# Altium PCB 安抚版大号发球机 1.6mm 双面板.PcbDoc (part 2 of 3)
Units mil, origin at the board's own origin, x right, y up, seen from the top; angles counter-clockwise.
Board outline 2637.8 x 5118.11 mil, 2 copper layers (Top Layer, Bottom Layer); 155 components, 97 nets, 435 pads, 221 vias.
Unrouted connection lines stored in the file: 1.
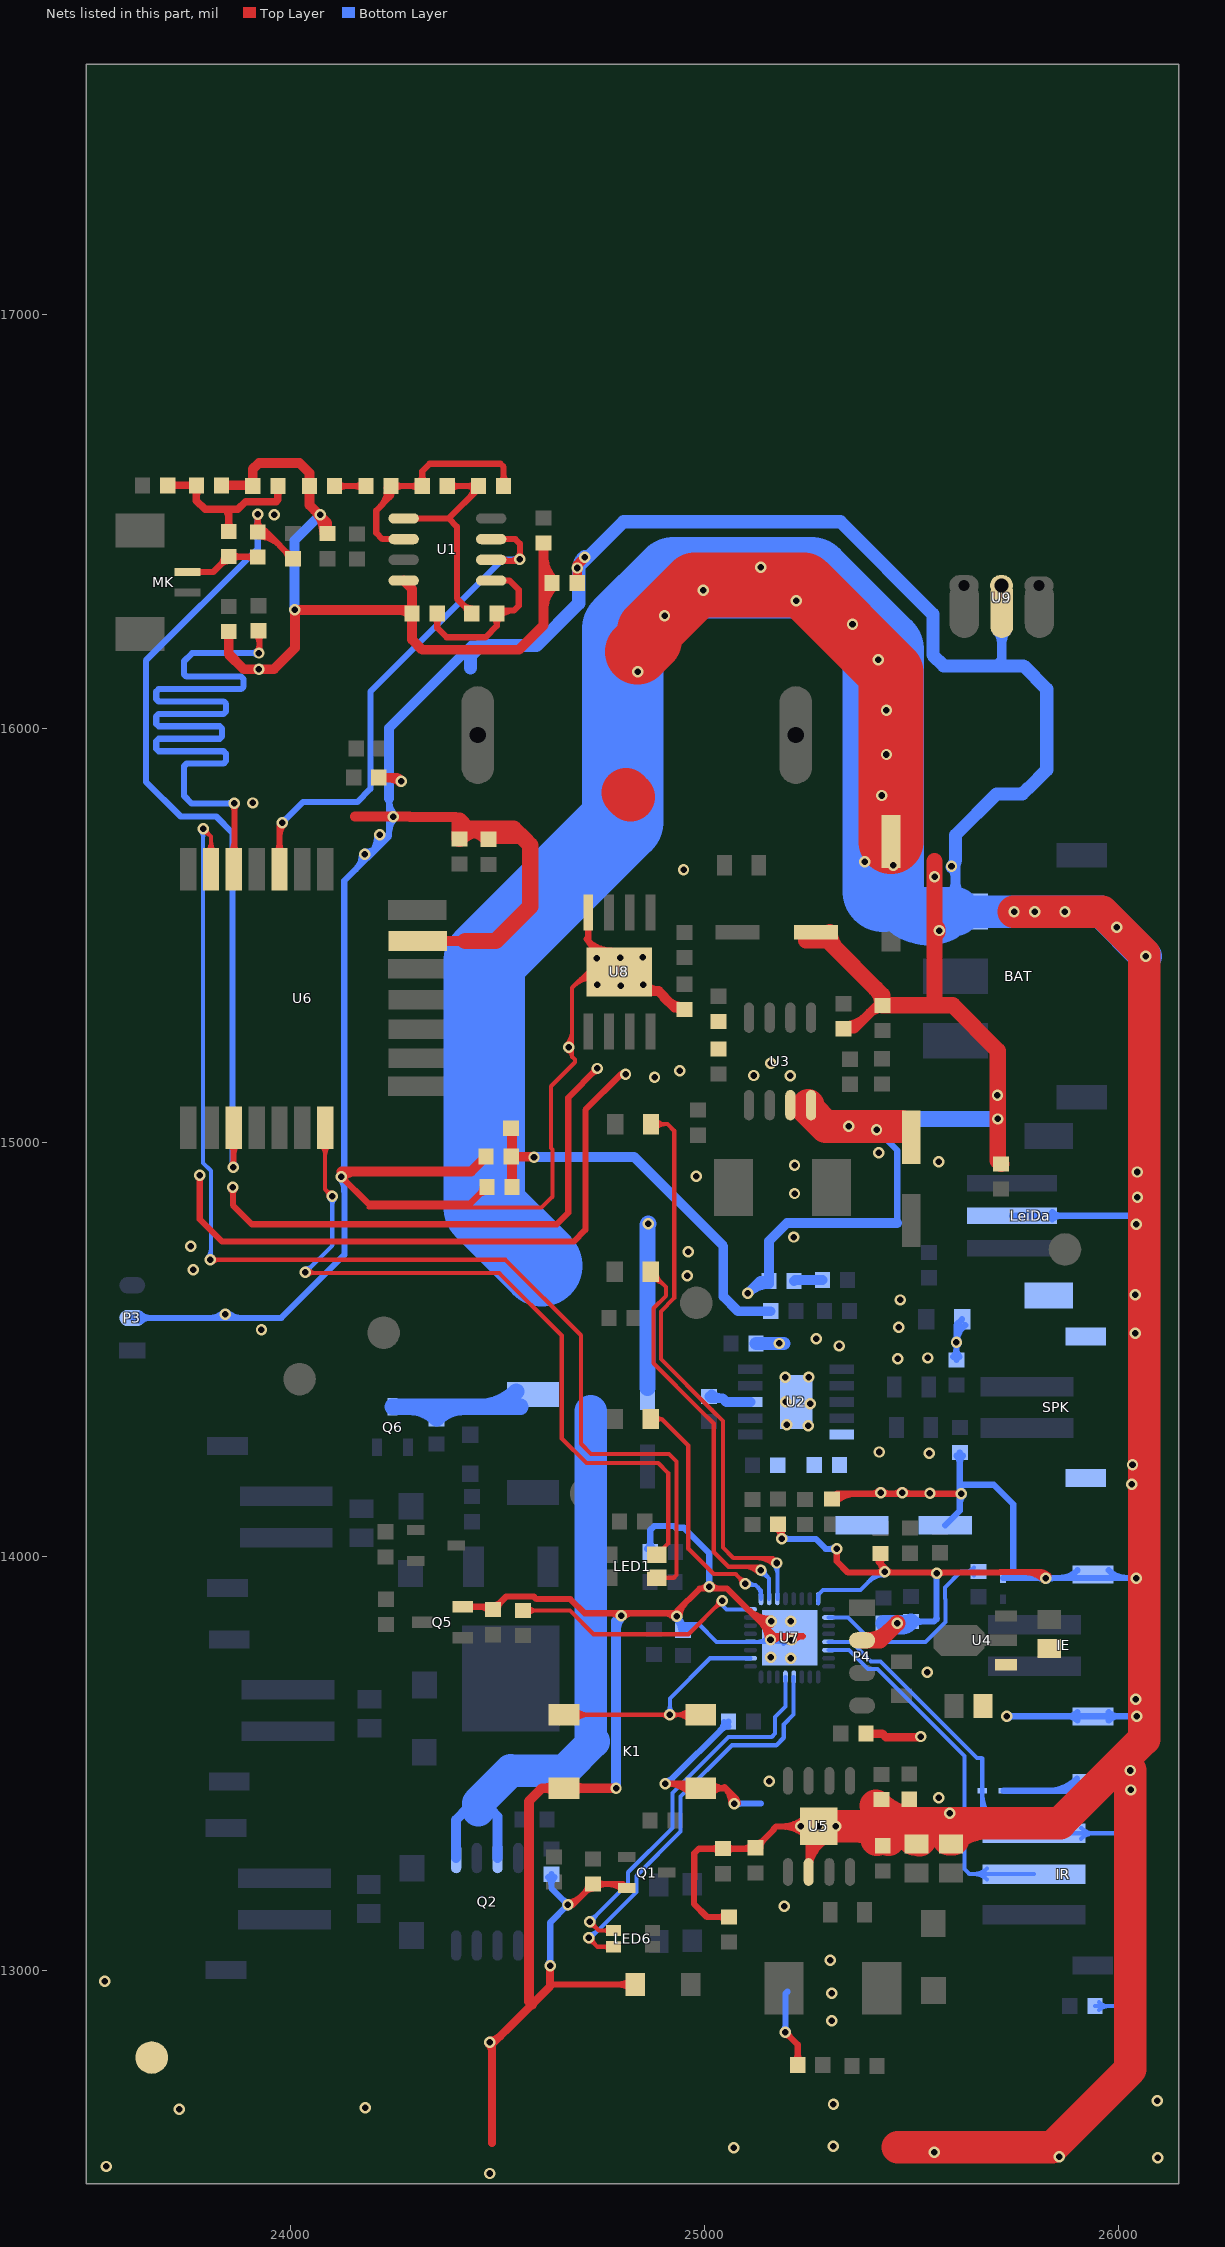
[diagram p2: the nets of this part, all layers, seen from the top]

## Via types
v1: diameter 27.56, hole 15.75, Top Layer to Bottom Layer, tented both sides, 221 vias

## Nets (pads, with @x,y where several pads share a name; then routed paths per layer and width w, separated by ;. In a path a pad name is that pad's centre, name@x,y a point inside that pad or via, vN(x,y) a via of type N, cw(c..) or ccw(c..) an arc to the next point about the centre after c; other vN are vias at no path point) (continued)
GND: 1. BAT.1 C1.2 C2.2 C5.2 C6.1 C8.2 C9.2 C10.2 C11.2 C12.2 C15.1 C16.2 C17.1 C19.2 C20.2 C21.2 C22.2 C23.2 C24.2 C25.1 C26.1 C27.2 C29.2 C30.1 C31.2 C32.1 C33.1 C34.1 C35.1 C38.2 C39.1 C40.2 C41.1 C42.2 C43.2 C44.1 C45.1 C46.2 C47.2 C48.1 C49.1 D3.1 D9.1 D10.1 IE.3 IE.4 IR.5 K1.1 K1.2 LED2.2 LeiDa.2 LeiDa.4 P3.2 P4.2 Q1.2 Q2.1 Q2.3 Q5.2 Q6.3 R4.2 R5.1 R5.2 R7.2 R11.1 R13.2 R17.1 R22.2 R25.1 R34.2 R36.1 R37.1 R38.1 R39.1 R43.2 R49.1 SPK.3 SPK.4 U1.4 U2.11 U3.7 U3.8 U4.1 U5.2 U5.9 U6.13 U7.4 U7.16 U7.33 U8.4 U8.9 U9.2 | length 44285.2
  Top Layer w10: 24190,14843.22 24607.22,14843.22 24633.38,14869.38 24633.38,14983.38 24630,14986.76 24630,15136 24688,15194 24688,15201 24681,15208 24681,15374 24719,15412 U8.9@24795,15412 ; v1@24666.79,15236.21 ccw(c24632.49,15270.51) 24681,15270.51 ; v1@24670.18,15221.69 cw(c24665.06,15206.59) 24681,15206.59 ; v1@24673.86,15229.14 ccw(c24656.63,15246.37) 24681,15246.37 ; 24682.99,15375.99 cw(c24734.15,15324.82) U8.9@24765.04,15390.25 ; 24693.03,15386.03 cw(c24740.59,15338.47) U8.9@24769.31,15399.29 ; 24703.08,15396.08 cw(c24747.04,15352.12) U8.9@24773.58,15408.33 ; 24713.12,15406.12 cw(c24753.48,15365.77) U8.9@24777.85,15417.38
  Top Layer w15: v1@23777.56,14916.56 cw(c23766.84,14905.84) 23782,14905.84 cw(c23797.16,14905.84) v1@23786.44,14916.56 ; v1(23782,14921) 23782,14815 23836,14761 24685,14761 24713.28,14789.28 24713.28,15016.48 24713,15016.76 24713,15079 24799,15165 v1(24810,15165) ; v1@23857.56,14887.56 cw(c23846.84,14876.84) 23862,14876.84 cw(c23877.16,14876.84) v1@23866.44,14887.56 ; v1(23862,14892) 23862,14849 23908,14803 24644,14803 24671.48,14830.48 24671.48,15108.48 v1(24742,15179) ; v1@24124,14911.72 cw(c24124,14896.56) 24134.72,14907.28 cw(c24145.44,14918) v1@24130.28,14918 ; v1(24124,14918) 24189,14853 24435.37,14853 R37.1@24475.37,14893 ; Q5.2@24417.21,13879.4 24460,13879.4 ; Q5.2@24432.48,13874.96 cw(c24443.2,13864.24) 24443.2,13879.4 cw(c24443.2,13894.56) Q5.2@24432.48,13883.84 ; 24455.24,14872.87 cw(c24475.37,14852.74) R37.1@24475.37,14881.21 ; R37.1@24457.62,14875.25 ccw(c24440.85,14892.02) R37.1@24464.56,14892.02 ; 24460.68,13880.09 24460,13879.4 ; R36.1@24479.36,13867.46 ccw(c24460,13857.74) 24460,13879.4 ; R36.1@24490.98,13883.12 ccw(c24490.98,13906.84) R36.1@24507.75,13890.07 ; R36.1@24501.79,13872.31 cw(c24530.26,13872.31) 24510.13,13892.44 ; 24628,12967.37 D3.1@24833.62,12967.37 ; v1(24671,13160) 24682.31,13160 R17.1@24732,13209.69 24803.12,13209.69 Q1.2@24812.69,13200.12 ; v1@24671,13166.28 ccw(c24671,13208.75) 24701.03,13178.72 ; 24711.87,13189.56 ccw(c24691.74,13209.69) R17.1@24720.21,13209.69 ; R17.1@24714.25,13191.93 cw(c24731.02,13175.16) R17.1@24731.02,13198.88 ; 24715.43,15491.57 cw(c24668.86,15445) U8.9@24734.72,15445 ; U8.4@24720,15555.7 24720,15487 U8.9@24795,15412 ; 24720.91,15486.09 ccw(c24775.31,15540.5) U8.9@24775.31,15463.56 ; 24727.34,15479.66 cw(c24688.52,15440.83) U8.9@24740.62,15423.52 ; v1@24735.72,15179 cw(c24720.56,15179) 24731.28,15168.28 cw(c24742,15157.56) v1@24742,15172.72 ; R17.1@24740.63,13202.04 cw(c24759.07,13183.6) 24759.07,13209.69 cw(c24759.07,13235.78) R17.1@24740.63,13217.33 ; U8.9@24741,15438.72 cw(c24741,15372.86) U8.9@24787.57,15419.43 ; U8.9@24741,15453.72 cw(c24741,15424.08) U8.9@24761.96,15445.04 ; U8.9@24741.04,15465.96 cw(c24720.08,15445) U8.9@24749.72,15445 ; U8.9@24744.52,15462.48 cw(c24714.31,15432.26) U8.9@24754.86,15418.8 ; 24769.93,13209.69 cw(c24769.93,13166.61) Q1.2@24800.39,13197.07 ; 24771.56,13863.5 cw(c24771.56,13829.56) v1@24795.56,13853.56 ; v1@24804.44,13853.56 cw(c24828.44,13829.56) 24828.44,13863.5 ; D3.1@24822.22,12955.97 ccw(c24794.7,12928.45) 24794.7,12967.37 ccw(c24794.7,13006.29) D3.1@24822.22,12978.77 ; 24900.73,13863.5 cw(c24900.73,13822.73) v1@24929.56,13851.56 ; v1(24906,13452) 24980.92,13452 K1.1@24991.6,13441.32 25051.68,13441.32 25072,13421 v1(25072,13404) ; v1@24910.33,13452 cw(c24910.33,13371.86) K1.1@24967,13428.53 ; v1@24910.44,13447.56 cw(c24921.16,13436.84) 24921.16,13452 cw(c24921.16,13467.16) v1@24910.44,13456.44 ; v1@24931.5,13863.5 24711.5,13863.5 24677,13898 24594.83,13898 24588.71,13904.12 24521.81,13904.12 R36.1@24490,13872.31 24482.91,13879.4 24460,13879.4 ; v1(24934,13856) 24934,13868 24989.28,13923.28 ; v1@24940.28,13856 cw(c24984.41,13856) 24953.21,13887.21 ; 24946.54,13452 cw(c24946.54,13408.08) K1.1@24977.6,13439.13 ; v1@25007.07,13931.89 cw(c24989.28,13945.96) 24989.28,13923.28 ; K1.1@25016.2,13428.53 cw(c25047.08,13397.65) 25047.08,13441.32 cw(c25047.08,13484.99) K1.1@25016.2,13454.11 ; v1@25016.44,13932.44 ccw(c25038.56,13954.56) 25038.56,13923.28 ; C49.1@25036.37,13287.67 ccw(c25017.93,13269.23) 25017.93,13295.32 ccw(c25017.93,13321.41) C49.1@25036.37,13302.96 ; 25049.26,13443.74 cw(c25009.52,13404) v1@25065.72,13404 ; C29.2@25051.37,13122.67 ccw(c25032.93,13104.22) 25032.93,13130.31 ccw(c25032.93,13156.4) C29.2@25051.37,13137.96 ; C49.1@25053.63,13287.67 cw(c25072.07,13269.23) 25072.07,13295.32 cw(c25072.07,13321.41) C49.1@25053.63,13302.96 ; C29.2@25060,13130.31 25006.69,13130.31 24975,13162 24975,13221 24976,13222 24976,13284 24987.32,13295.32 C49.1@25045,13295.32 25122,13295.32 C27.2@25124,13297.31 25168,13341.31 25168,13343 25174,13349 v1(25277,13349) 25252,13324 U5.2@25252,13239 ; v1@25067.56,13408.44 ccw(c25056.84,13419.16) 25072,13419.16 ccw(c25087.16,13419.16) v1@25076.44,13408.44 ; 25074.87,13418.13 cw(c25060.73,13404) v1@25080.72,13404 ; 25092.1,13295.32 ccw(c25092.1,13328.23) C27.2@25115.37,13304.96 ; 25101.75,13295.32 cw(c25101.75,13276.05) C27.2@25115.37,13289.67 ; 25104.18,13874.23 ccw(c25162,13932.05) v1@25162,13850.28 ; C27.2@25124.98,13308.12 ccw(c25124.98,13331.84) C27.2@25141.75,13315.07 ; 25129.78,13848.62 ccw(c25162,13880.84) v1@25162,13835.28 ; C27.2@25135.79,13297.31 cw(c25164.26,13297.31) 25144.13,13317.44 ; 25135.83,13842.58 cw(c25092.64,13799.39) v1@25153.72,13799.39 ; 25161.44,13816.97 cw(c25143.86,13799.39) v1@25168.72,13799.39 ; v1@25164.44,13794.95 cw(c25196.58,13762.81) 25196.58,13808.26 ; 25172.48,13808.26 cw(c25172.48,13761.48) v1@25205.56,13794.56 ; R34.2@25172.9,14069.75 cw(c25154.74,14043.09) v1@25187,14043.09 ; R34.2@25178,14078.68 25187,14069.68 v1(25187,14044) ; v1@25182.56,14048.44 ccw(c25171.84,14059.16) 25187,14059.16 ccw(c25202.16,14059.16) v1@25191.44,14048.44 ; v1@25196,12845.72 cw(c25196,12830.56) 25206.72,12841.28 cw(c25217.44,12852) v1@25202.28,12852 ; v1(25196,12852) 25225.68,12822.32 C32.1@25225.68,12773 ; v1@25215.36,13795.72 cw(c25237.74,13782.01) 25237.74,13808.26 ; C32.1@25218.04,12781.63 ccw(c25199.59,12800.07) 25225.68,12800.07 ccw(c25251.77,12800.07) C32.1@25233.33,12781.63 ; v1@25228.56,13344.56 ccw(c25217.84,13333.84) 25217.84,13349 ccw(c25217.84,13364.16) v1@25228.56,13353.44 ; 25237,13809 25237.74,13808.26 ; U5.9@25237.44,13344.56 cw(c25248.16,13333.84) 25248.16,13349 cw(c25248.16,13364.16) U5.9@25237.44,13353.44 ; U5.9@25250.29,13322.29 ccw(c25185.8,13257.8) 25185.8,13349 ccw(c25185.8,13440.2) U5.9@25250.29,13375.71 ; U5.2@25252,13236.2 cw(c25346.95,13236.2) U5.9@25296.91,13316.9 ; U5.2@25252,13263.15 cw(c25330.24,13263.15) U5.9@25289,13329.64 ; 25252,13290.11 cw(c25313.52,13290.11) U5.9@25281.1,13342.39 ; U5.9@25260.9,13332.9 ccw(c25222.01,13294.01) 25222.01,13349 ccw(c25222.01,13403.99) U5.9@25260.9,13365.1 ; U5.9@25270.72,13349 cw(c25255.56,13349) 25266.28,13338.28 cw(c25277,13327.56) U5.9@25277,13342.72 ; U5.9@25272.56,13344.56 ccw(c25261.84,13333.84) 25261.84,13349 ccw(c25261.84,13364.16) U5.9@25272.56,13353.44 ; C41.1@25306.02,14142.28 cw(c25329.48,14118.82) 25329.48,14152 ; C41.1@25308,14139.32 25320.68,14152 v1(25621,14152) ; v1@25315.56,14014.56 cw(c25304.84,14003.84) 25320,14003.84 cw(c25335.16,14003.84) v1@25324.44,14014.56 ; C41.1@25316.63,14131.67 cw(c25365.7,14082.6) 25365.7,14152 ; v1(25320,14019) 25320,13989 25347,13962 v1@25447,13962 ; 25403.6,14152 ccw(c25403.6,14177.4) v1@25421.56,14159.44 ; 25416.01,13962 ccw(c25416.01,13983.99) v1@25431.56,13968.44 ; C26.1@25418.67,13999.74 cw(c25403.22,13983) 25426,13983 ; C26.1@25419.34,14000.04 cw(c25403.27,13983.97) 25426,13983.97 ; 25421.5,13987.5 cw(c25401.28,13967.28) v1@25429.75,13964.59 ; C26.1@25426,14007.68 25426,13983 ; v1@25430.44,14159.44 ccw(c25448.4,14177.4) 25448.4,14152 ; C26.1@25433.33,13999.74 ccw(c25448.78,13983) 25426,13983 ; C26.1@25433.78,13999.28 ccw(c25446.96,13982.98) 25426,13982.98 ; v1@25440.44,13968.44 ccw(c25455.99,13983.99) 25455.99,13962 ; 25455.6,14152 ccw(c25455.6,14177.4) v1@25473.56,14159.44 ; v1@25482.44,14159.44 ccw(c25500.4,14177.4) 25500.4,14152 ; 25527.43,14152 ccw(c25527.43,14170.57) v1@25540.56,14157.44 ; 25541.01,13962 cw(c25541.01,13940.01) v1@25556.56,13955.56 ; v1@25549.44,14157.44 ccw(c25562.57,14170.57) 25562.57,14152 ; v1@25565.44,13955.56 cw(c25580.99,13940.01) 25580.99,13962 ; v1@25616.56,14147.56 ccw(c25605.84,14136.84) 25605.84,14152 ccw(c25605.84,14167.16) v1@25616.56,14156.44 ; 25773.63,13963 cw(c25773.63,13896.63) v1@25820.56,13943.56 ; 25809.84,13963 cw(c25809.84,13932.84) v1@25831.17,13954.17 ; v1@25818.72,13948 ccw(c25803.56,13948) 25814.28,13958.72 ccw(c25825,13969.44) v1@25825,13954.28 ; v1(25825,13948) 25810,13963 25714,13963 25713,13962 v1@25447,13962 ; 24989.28,13923.28 25055.13,13923.28 25170.15,13808.26 25237.74,13808.26 ; 25426,13983 v1@25447,13962
  Top Layer w19.68: v1@24479.22,12825.22 cw(c24458.01,12804.01) 24488,12804.01 ; v1@24482,12831.94 ccw(c24482,12868) 24507.5,12842.5 ; 24488,12585 24488,12823 24550,12885 24550.72,12885 24584.36,12918.64 24628,12962.28 24628,12967.37 v1(24628,13013)
  Top Layer w20: R22.2@25390.32,13573 25430.06,13573 25438.84,13564.22 v1@25521.22,13564.22 ; R22.2@25396.19,13567.13 cw(c25410.37,13552.94) 25410.37,13573 cw(c25410.37,13593.06) R22.2@25396.19,13578.87
  Top Layer w23.62: C2.2@23834.63,16587 23908,16587 C1.2@23910,16585 23910,16626 23925,16641 24023,16641 24047,16617 C5.2@24047,16585 24047,16539 24090,16496 R4.2@24090,16470.32 ; R49.1@23850,16231.69 R49.1@23852,16233.69 23852,16179 23888,16143 23961,16143 24012,16194 24012,16285 v1(24011,16286) 24286.68,16286 R7.2@24294.68,16278 ; 24059.07,16526.93 cw(c24002.45,16470.32) R4.2@24082.52,16470.32 ; v1@24124,14930 24437.37,14930 C40.2@24473.37,14966 ; v1@24125.39,14916.61 cw(c24157.72,14884.28) 24157.72,14930 ; 24156,15787 v1(24249,15787) 24289.24,15787 24289.83,15786.41 24399.59,15786.41 24409,15777 ; C44.1@24214.32,15881 24259,15881 v1(24268,15872) ; 24241.52,15881 cw(c24241.52,15845.52) v1@24266.61,15870.61 ; 24262.06,16286 cw(c24262.06,16246.36) R7.2@24290.09,16274.39 ; U1.4@24274.39,16357 24294.68,16336.71 R7.2@24294.68,16278 ; U6.13@24308.39,15486.76 24423,15486.76 ; U6.13@24363.99,15478.4 cw(c24384.15,15458.24) 24384.15,15486.76 cw(c24384.15,15515.27) U6.13@24363.99,15495.11 ; C39.1@24479,15733.31 24564.69,15733.31 ; 24584.36,12918.64 24577,12926 24577,13410 24608.32,13441.32 K1.2@24660.9,13441.32 24786.68,13441.32 v1(24787,13441) ; 24612,16284.4 cw(c24698.3,16284.4) R5.2@24637.28,16345.42 ; 24612,16341.43 cw(c24641.27,16341.43) R5.2@24620.57,16362.13 ; 24612,16360.57 ccw(c24641.27,16360.57) R5.2@24620.57,16339.87 ; 24612,16417.6 ccw(c24698.3,16417.6) R5.2@24637.28,16356.58 ; C6.1@24612,16447.68 24612,16249 24553,16190 24319,16190 24294.68,16214.32 24294.68,16235 R7.2@24294.68,16278 ; K1.2@24639.34,13431.58 ccw(c24615.82,13408.05) 24615.82,13441.32 ccw(c24615.82,13474.59) K1.2@24639.34,13451.06 ; K1.2@24682.45,13431.58 cw(c24705.98,13408.05) 24705.98,13441.32 cw(c24705.98,13474.59) K1.2@24682.45,13451.06 ; R5.1@24693.31,16351 v1(24693.31,16387.31) v1@24693.31,16395.31 ; v1@24695.28,16387.31 cw(c24716.93,16387.31) 24701.62,16402.62 ; v1@24698,16400 24699,16400 v1(24712,16413) ; U8.9@24795,15412 24839.5,15367.5 24841,15366 24890,15366 ; U8.9@24808.5,15398.5 ccw(c24846.82,15436.82) U8.9@24852.78,15382.96 ; U8.9@24854.49,15382.28 ccw(c24890,15412.85) 24890,15366 ; 24912.35,15341.65 ccw(c24945.54,15374.84) C47.2@24950.35,15328.15 ; C47.2@24946.02,15317.54 ccw(c24928,15302.59) 24928,15326 ; C47.2@24952,15321.69 24947.69,15326 24928,15326 ; R13.2@25336,15274.68 25361.68,15274.68 25418.31,15331.31 R11.1@25430,15331.31 ; R13.2@25336.98,15281.18 ccw(c25336.98,15356.49) 25390.24,15303.24 ; 25399.66,15312.66 cw(c25429.02,15283.3) R11.1@25429.02,15324.82 ; 24890,15366 24903,15353 24903,15351 24928,15326
  Top Layer w39.37: C42.2@24409,15733.31 24409,15777 24428,15758 ; C42.2@24409.01,15734.29 cw(c24466.25,15677.04) 24466.25,15758 ; 24423,15486.76 24496.76,15486.76 24580,15570 24580,15718 24564.69,15733.31 24540,15758 24428,15758 ; C39.1@24479.01,15733.29 cw(c24538.66,15673.64) 24538.66,15758 ; C39.1@24479.1,15733.17 ccw(c24428,15693.01) 24428,15758 ; 25245.49,15488 25298,15488 25430,15356 R11.1@25430,15331.31 25556,15331.31 ; C21.2@25302.95,15508 ccw(c25363.2,15508) 25320.6,15465.4 ; P4.2@25381,13798.26 25424.58,13798.26 v1(25466,13839.68) ; P4.2@25392.81,13798.26 ccw(c25392.81,13874.95) 25447.04,13820.72 ; 25413.22,15372.78 cw(c25371.75,15331.31) R11.1@25430.39,15331.31 ; 25556,15499.7 cw(c25579.3,15499.7) v1@25562.82,15516.18 ; 25556,15524.3 ccw(c25579.3,15524.3) v1@25562.82,15507.82 ; 25556,15679 v1(25556,15642) 25556,15331.31 ; C19.2@25717,14948.31 25709,14956.31 v1(25709,15057) 25709,15222 25599.69,15331.31 25556,15331.31
  Top Layer w78.74: U3.8@25251,15090.39 25251,15081 25293,15039 v1(25349,15039) 25477,15039 ; v1(25277,13349) 25437,13349 25445,13357 ; 25368.16,13349 cw(c25368.16,13240.46) C35.1@25444.91,13317.21 ; C30.1@25414.09,13398.79 ccw(c25514.98,13499.68) 25514.98,13357 ; C35.1@25417.09,13317.21 cw(c25513.15,13221.15) 25513.15,13357 ; 25467,12574 25840.09,12574 26029,12762.91 v1(26029,13484) ; C33.1@25506.41,13318.73 cw(c25598.8,13226.35) 25598.8,13357 ; 25509.2,13357 cw(c25509.2,13226.35) C34.1@25601.59,13318.73 ; C33.1@25519.85,13315.92 ccw(c25445,13268.28) 25445,13357 ; C34.1@25590.41,13318.73 cw(c25682.8,13226.35) 25682.8,13357 ; 25445,13357 25859,13357 26062,13560 26062,14815 26062,15456 25961,15557 v1(25871,15557) v1(25798,15557) ; v1(25798,15557) v1(25748,15557) v1(25798,15557)
  Top Layer w118.11: 24811,15845 24822,15834
  Top Layer w157.48: 24839,16185 24868,16214 24868,16236 24978,16346 25240,16346 25450.92,16135.08 C38.2@25450.92,15726.83
  Bottom Layer w8: U7.16@25274.91,13898.72 25274.91,13889.91 25274,13889 25275,13888 U7.16@25275,13886
  Bottom Layer w10: C48.1@24943.51,13824.02 cw(c24960.75,13819.49) C48.1@24960.75,13837.32 ; C48.1@24949,13837.32 24986.68,13837.32 ; C48.1@24953.18,13821.48 cw(c24973.72,13816.08) 24973.72,13837.32 ; C48.1@24962.86,13818.94 cw(c24986.68,13812.68) 24986.68,13837.32 ; U7.4@25126.73,13794.39 ccw(c25126.73,13832.65) U7.33@25153.79,13805.6 ; U7.33@25166.21,13805.6 ccw(c25193.27,13832.65) U7.33@25193.27,13794.39 ; U7.33@25177.67,13794.39 ccw(c25177.67,13831.33) U7.33@25203.79,13805.21 ; U7.33@25191.55,13789.78 cw(c25199.6,13781.73) U7.33@25205.47,13791.48 ; U7.33@25201.23,13799.29 cw(c25196.16,13799.45) U7.33@25196.16,13794.39 ; U7.33@25206,13804.23 U7.33@25196.16,13794.39 ; U7.16@25274.91,13898.72 25274.91,13907.91 25287,13920 25377,13920 25421,13964 ; 25395.41,13938.41 cw(c25436,13897.81) v1@25436,13955.22 ; 25412.48,13955.48 cw(c25436,13931.95) v1@25436,13965.22 ; 25413.5,13956.5 cw(c25422.35,13947.65) v1@25430.37,13957.26 ; 25421.24,13964.24 cw(c25429.39,13956.08) v1@25436.78,13964.94 ; v1@25428.34,13959.7 ccw(c25421,13955.58) 25421,13964 ; v1@25428.34,13968.3 cw(c25421,13972.42) 25421,13964 ; v1@25445,13964 v1(25436,13964) 25421,13964 ; 24986.68,13837.32 25029.61,13794.39 U7.4@25111.51,13794.39 U7.33@25196.16,13794.39
  Bottom Layer w15: P3.2@23619,14576.74 23978.74,14576.74 24131.28,14729.28 24131.28,14882.13 ; P3.2@23639.43,14568.12 cw(c23660.23,14547.32) 23660.23,14576.74 cw(c23660.23,14606.16) P3.2@23639.43,14585.36 ; 23806.48,14576.74 ccw(c23806.48,14623.52) v1@23839.56,14590.44 ; v1@23848.44,14590.44 ccw(c23881.52,14623.52) 23881.52,14576.74 ; v1@24119.56,14913.56 cw(c24091.94,14885.94) 24131,14885.94 ; v1@24119.56,14922.44 ccw(c24091.94,14950.06) 24131,14950.06 ; 24131,14882.41 24131,15632 24239,15740 24239,15830 ; 24158.67,15659.67 ccw(c24122.35,15696) v1@24173.72,15696 ; v1@24180,15702.28 ccw(c24180,15753.65) 24216.33,15717.33 ; v1@24188.6,15689.6 ccw(c24135.21,15743) v1@24210.72,15743 ; 24214.21,15715.21 ccw(c24186.42,15743) v1@24225.72,15743 ; 24239,15747.7 cw(c24288.3,15747.7) v1@24253.44,15782.56 ; 24239,15826.3 ccw(c24288.3,15826.3) v1@24253.44,15791.44 ; R25.1@24623.36,13226.04 cw(c24604.91,13207.6) 24631,13207.6 cw(c24657.09,13207.6) R25.1@24638.64,13226.04 ; v1@24623.56,13017.44 ccw(c24612.84,13028.16) 24628,13028.16 ccw(c24643.16,13028.16) v1@24632.44,13017.44 ; v1(24628,13013) 24628,13117 v1(24671,13160) 24631,13200 R25.1@24631,13233.69 ; v1@24671,13153.72 ccw(c24671,13138.56) 24660.28,13149.28 ccw(c24649.56,13160) 24664.72,13160 ccw(c24649.56,13160) 24660.28,13170.72 ccw(c24671,13181.44) v1@24671,13166.28 ; C43.2@24862.04,14019.63 ccw(c24843.6,14038.07) 24869.69,14038.07 ccw(c24895.78,14038.07) C43.2@24877.33,14019.63 ; C43.2@24869.69,14011 24869.69,14064.69 24879,14074 24927,14074 24931,14070 24951,14070 25012,14009 v1(25012,13928) ; v1@24906,13458.28 ccw(c24906,13482.77) 24923.31,13465.45 ; v1@24913,13452 24913,13455.14 25058.68,13600.82 R43.2@25058.68,13602 ; v1@24930.13,13851.05 cw(c24906.31,13820.57) C48.1@24945,13820.57 ; v1@24933.62,13849.73 cw(c24932.9,13837.65) C48.1@24945,13837.65 ; v1(24934,13856) 24934,13852.32 24945,13841.32 C48.1@24945,13822.32 ; v1@24940.08,13854.43 ccw(c24951.49,13851.49) 24943.16,13843.16 ; v1@25007.56,13932.44 ccw(c24996.84,13943.16) 25012,13943.16 ccw(c25027.16,13943.16) v1@25016.44,13932.44 ; 25040.1,13582.23 ccw(c25021.32,13601.02) R43.2@25047.88,13601.02 ; 25040.57,13582.7 cw(c25058.68,13564.59) R43.2@25058.68,13590.21 ; v1(25072,13404) 25137,13404 ; v1@25076.44,13399.56 cw(c25087.16,13388.84) 25087.16,13404 cw(c25087.16,13419.16) v1@25076.44,13408.44 ; v1(25187,14044) 25187,14043 25269,14043 25293,14019 v1(25320,14019) ; v1@25191.44,14048.44 ccw(c25204.57,14061.57) 25204.57,14043 ; v1@25191.56,12856.44 ccw(c25180.84,12867.16) 25196,12867.16 ccw(c25211.16,12867.16) v1@25200.44,12856.44 ; v1(25196,12852) 25196,12945 25201,12950 ; v1@25315.56,14014.56 ccw(c25304.84,14003.84) 25304.84,14019 ccw(c25304.84,14034.16) v1@25315.56,14023.44 ; v1@25416,15024.72 cw(c25416,15009.56) 25426.72,15020.28 cw(c25437.44,15031) v1@25422.28,15031 ; v1(25416,15031) 25466,14981 25466,14806 ; C46.2@25499,13843.69 25554.69,13843.69 25562,13851 25560.72,13852.28 25560.72,13959.72 v1(25561,13960) ; C46.2@25507.63,13836.04 cw(c25526.07,13817.6) 25526.07,13843.69 cw(c25526.07,13869.78) C46.2@25507.63,13851.33 ; v1@25556.56,13955.56 cw(c25546.51,13945.51) 25560.72,13945.51 ; 25560.72,13944.16 cw(c25576.84,13944.16) v1@25565.44,13955.56 ; C9.2@25581.83,14075.92 25617,14111.09 25617,14174 ; C15.1@25601.36,14482.96 ccw(c25582.91,14501.41) 25609,14501.41 ccw(c25635.09,14501.41) C15.1@25616.64,14482.96 ; v1@25604.56,14513.56 cw(c25593.84,14502.84) 25609,14502.84 cw(c25624.16,14502.84) v1@25613.44,14513.56 ; v1@25604.56,14522.44 ccw(c25593.84,14533.16) 25609,14533.16 ccw(c25624.16,14533.16) v1@25613.44,14522.44 ; C15.1@25609,14475.32 v1(25609,14518) 25609,14559.77 LED2.2@25622.63,14573.4 ; v1@25609,14516.19 cw(c25662.67,14516.19) LED2.2@25630.04,14558.81 ; 25609,14546.58 cw(c25639.41,14546.58) LED2.2@25620.92,14570.72 ; C17.1@25609.36,14244.04 cw(c25590.91,14225.59) 25617,14225.59 cw(c25643.09,14225.59) C17.1@25624.64,14244.04 ; 25617,14127.18 cw(c25645.82,14127.18) v1@25625.44,14147.56 ; C17.1@25617,14251.68 25617,14174 ; v1@25625.03,14156.82 cw(c25639.4,14174) 25617,14174 ; D9.1@25721,13948.59 25746,13948.59 ; D10.1@25722.59,13435 25918.4,13435 IR.5@25937.87,13454.47 25999.47,13454.47 ; v1@25730,13615 v1(25730.26,13614.74) IE.4@25938.87,13614.74 26035.74,13614.74 v1@26036,13615 ; v1@25734.7,13610.3 cw(c25745.42,13599.58) 25745.42,13614.74 cw(c25745.42,13629.9) v1@25734.7,13619.18 ; LeiDa.2@25743.27,14823.41 26027.59,14823.41 26036,14815 ; 25808.42,13948.59 cw(c25808.42,13931.42) v1@25820.56,13943.56 ; 25829.13,13435 ccw(c25829.13,13535.64) IR.5@25900.3,13464.48 ; v1@25829.44,13943.56 cw(c25841.58,13931.42) 25841.58,13948.59 ; LeiDa.2@25840.47,14814.79 cw(c25861.27,14793.99) 25861.27,14823.41 cw(c25861.27,14852.82) LeiDa.2@25840.47,14832.02 ; 25856.21,13948.59 ccw(c25856.21,14012.36) IE.3@25901.3,13967.27 ; 25865.34,13435 ccw(c25865.34,13499.43) IR.5@25910.9,13453.87 ; IE.4@25901.3,13604.73 ccw(c25877.14,13580.57) 25877.14,13614.74 ccw(c25877.14,13648.91) IE.4@25901.3,13624.75 ; IR.5@25975.46,13444.49 cw(c25999.47,13420.6) 25999.47,13454.47 ; IR.5@25975.46,13464.45 ccw(c25999.47,13488.34) 25999.47,13454.47 ; IE.4@25976.43,13604.73 cw(c26000.59,13580.57) 26000.59,13614.74 cw(c26000.59,13648.91) IE.4@25976.43,13624.75 ; IE.3@25976.43,13967.27 ccw(c26021.52,14012.36) 26021.52,13948.59 ; v1@26022.72,13484 cw(c26007.56,13484) 26018.28,13473.28 cw(c26029,13462.56) v1@26029,13477.72 ; 26028.21,13614.74 ccw(c26028.21,13630.79) v1@26039.56,13619.44 ; 26028.74,14822.26 cw(c26009.49,14803) v1@26036.72,14803 ; v1(26029,13484) 25999.47,13454.47 ; 26029.47,13614.74 cw(c26029.47,13600.47) v1@26039.56,13610.56 ; v1@26038.56,13944.15 ccw(c26027.84,13933.43) 26027.84,13948.59 ccw(c26027.84,13963.75) v1@26038.56,13953.03 ; v1(26043,13948.59) 25746,13948.59 ; 25617,14174 25699,14174 25746.28,14126.72 25746.28,14027.28 25746,14027 25746,13948.59
  Bottom Layer w23.62: v1(24011,16286) 24011,16454 v1(24073,16516) ; 24239,15830 24239,16001 24438,16200 24459,16200 ; Q2.1@24401,13272.61 24401,13365 24430,13394 24436,13388 24454,13388 24486,13388 24501,13373 Q2.3@24501,13272.61 ; v1(24787,13441) 24787,13845 v1(24800,13858) ; 24787,13821.86 cw(c24836.14,13821.86) v1@24801.39,13856.61 ; v1(25105,14636) 25135,14666 C12.2@25156.37,14666 25156.37,14762.37 25200,14806 25466,14806 ; v1@25107.12,14638.12 cw(c25156.37,14588.86) C12.2@25156.37,14658.52 ; 25432,16141 25442,16151 ; BAT.1@25584.5,15579.91 ccw(c25530.73,15633.68) 25606.77,15633.68 ccw(c25682.81,15633.68) BAT.1@25629.04,15579.91 ; v1@25595.61,15665.61 cw(c25568.67,15638.67) 25606.77,15638.67 ; v1@25595.9,15668.63 ccw(c25582.25,15689) 25606.77,15689 BAT.1@25606.77,15557.64 ; 25703,16151 25718.45,16166.45 U9.2@25718.45,16265 ; U9.2@25707.31,16234.53 cw(c25680.43,16207.64) 25718.45,16207.64 cw(c25756.47,16207.64) U9.2@25729.58,16234.53
  Bottom Layer w31.5: 24436,16146 24436,16177 24459,16200 24595,16200 24697,16302 24697,16391 24805,16499 25329,16499 25552,16276 25552,16250 25552,16177 25578,16151 25611,16151 25703,16151 25771,16151 25827,16095 25827,15900 25782,15855 25781,15855 25768,15842 25706,15842 25606.77,15742.77 25606.77,15689 ; v1@24697,16381.54 cw(c24743.46,16381.54) v1@24710.61,16414.39 ; v1@24697,16386.37 cw(c24732.69,16386.37) v1@24710.79,16414.55 ; C16.2@25125.31,14515 v1@25193,14515 ; v1@25598.39,15665.61 ccw(c25578.17,15685.83) 25606.77,15685.83 cw(c25578.17,15685.83) v1@25598.39,15665.61
  Bottom Layer w39.37: Q6.3@24247.52,14361.94 R39.1@24556.54,14361.94 ; 24287.24,14361.94 cw(c24287.24,14267.54) 24353.99,14334.29 cw(c24420.76,14267.54) 24420.76,14361.94 ; 24456.52,14361.94 ccw(c24456.52,14488.54) R39.1@24546.04,14399.02 ; C8.2@24863,14407.49 24863,14802 v1(24865,14804) ; v1(25416,15031) 25442,15057 v1(25709,15057) ; C45.1@25433,13839.68 v1(25466,13839.68) C46.2@25495,13839.68 ; v1@25463.42,13834.37 ccw(c25475.48,13859.2) C46.2@25495,13839.68 ; v1@25464.64,13833.94 ccw(c25473.08,13869.6) C46.2@25499,13843.69 C46.2@25495,13839.68
  Bottom Layer w78.74: 24454,13388 24454,13405 24533,13484 24534,13483 24662,13483 24733,13554 ; 24726,13554 24726,14351 ; BAT.1@25606.77,15557.64 25958.36,15557.64 v1(26066,15450)
  Bottom Layer w118.11: 25432,15607 25481.36,15557.64 BAT.1@25606.77,15557.64 ; 25476.99,15562.01 ccw(c25541.03,15626.05) BAT.1@25577.71,15543.24
  Bottom Layer w196.85: 24608,14703 24468.8,14842.21 24468.8,15440.79 24803,15775 24803,15879 24803,16240 24927,16364 25258,16364 25432,16190 25432,16141 25432,15607
  other v1: 24482,12511 23556,12528 26095,12549 25857,12551 25555,12562 25071,12573 25311,12577 23732,12666 24182,12670 25312,12678 26094,12687 24482,12828 25308,12880 25308,12946 23553,12975 25304,13026 25193,13156 25233,13349 25318,13349 25593,13381 25566,13418 26030,13437 25157,13458 25523,13566 26044,13615 26042,13656 25538,13721 25209,13755 25161,13757 25160,13799.39 25210,13799 25162,13844 25209,13844 25545,14153 25426,14155 25478,14155 26032,14175 26034,14222 25543,14250 25423,14253 25251,14316 25199,14319 25256,14369 25197,14374 25196,14433 25252,14434 25467,14478 25540,14480 25326,14509 25181,14515 25270,14526 26041,14540 23931,14548 25470,14554 23844,14586 25473,14620 26041,14633 24959,14679 23766,14693 24961,14736 23760,14750 25216,14772 26043,14803 26046,14868 25218,14877 24981,14919 26045,14929 25218,14945 25566,14954 25421,14975 25708,15114 24880,15158 25208,15161 25120,15162 24941,15173 25161,15192 24673,15230 24798,15379 24742,15381 24853,15381 24741,15445 24797,15446 24852,15447 25567,15512 25996.03,15519.97 24950,15659 25597,15667 25456,15670 25388,15678 24180,15696 24217,15743 23910,15820 25429,15838 25440,15937 25440,16044 24839,16137 23925,16143 25420.51,16165.49 25358,16251 24904.16,16272.16 25222,16308 24998,16334 25136,16389 23962,16516
IE_PWM: R46.1 U7.18 | length 558
  Bottom Layer w10: U7.18@25300.51,13853.45 25347.24,13853.45 25406.7,13794 25533.99,13794 25582.5,13842.51 25582.5,13897.63 25581.22,13898.91 25581.22,13926.22 25619.31,13964.31 R46.1@25662,13964.31 ; R46.1@25651.61,13954.9 ccw(c25628.89,13932.19) 25628.89,13964.31 ccw(c25628.89,13996.44) R46.1@25651.61,13973.72
IR: D10.2 IR.1 R47.1 U7.21 | length 1937.4
  Bottom Layer w10: U7.21@25300.51,13794.39 25355.39,13794.39 25402.35,13747.44 25425.35,13747.44 25658.78,13514 25670,13514 25671.41,13512.59 D10.2@25671.41,13435 ; 25671.41,13363.36 ccw(c25726.2,13363.36) IR.1@25687.76,13324.31 ; 25671.41,13387.24 ccw(c25749.71,13387.24) IR.1@25694.77,13331.44 ; 25671.41,13411.12 ccw(c25773.23,13411.12) IR.1@25701.79,13338.56 ; IR.1@25708.81,13345.69 cw(c25796.74,13435) D10.2@25671.41,13435 ; IR.1@25909.7,13319.25 cw(c25941.49,13287.46) 25941.49,13332.42 cw(c25941.49,13377.38) IR.1@25909.7,13345.59 ; R47.1@25943.31,12915 26010,12915 26051,12956 26051,13325 26043.58,13332.42 IR.1@25796.13,13332.42 25694.58,13332.42 25671.41,13355.59 D10.2@25671.41,13435 ; R47.1@25952.72,12905.59 cw(c25975.44,12882.87) 25975.44,12915 cw(c25975.44,12947.13) R47.1@25952.72,12924.41
IR_CON: IR.2 U7.22 | length 950.3
  Bottom Layer w10: U7.22@25300.51,13774.72 25349.61,13774.72 25395.33,13729 25418.33,13729 25628,13519.33 25628,13246 25640,13234 IR.2@25796.13,13234 ; IR.2@25682.57,13220.83 ccw(c25650.78,13189.04) 25650.78,13234 ccw(c25650.78,13278.96) IR.2@25682.57,13247.17
KEY: K1.3 K1.4 U7.2 | length 865.9
  Top Layer w10: K1.4@24660.9,13618.48 v1(24917,13618.48) K1.3@24991.6,13618.48 K1.3@24988.12,13615 ; K1.4@24687.27,13603.92 cw(c24722.42,13568.77) 24722.42,13618.48 cw(c24722.42,13668.19) K1.4@24687.27,13633.04 ; v1@24910.79,13612.27 ccw(c24895.8,13597.28) 24895.8,13618.48 ccw(c24895.8,13639.68) v1@24910.79,13624.69 ; v1@24923.21,13612.27 cw(c24938.2,13597.28) 24938.2,13618.48 cw(c24938.2,13639.68) v1@24923.21,13624.69 ; K1.3@24965.23,13603.92 ccw(c24930.08,13568.77) 24930.08,13618.48 ccw(c24930.08,13668.19) K1.3@24965.23,13633.04
  Bottom Layer w10: v1@24910.79,13624.69 ccw(c24895.8,13639.68) 24917,13639.68 ccw(c24938.2,13639.68) v1@24923.21,13624.69 ; v1(24917,13618.48) 24917,13658 25014.02,13755.02 25054,13755.02 U7.2@25111.51,13755.02
LED_B: LED1.1 U6.20 | length 3149.6
  Top Layer w10: v1@23790,15749.22 cw(c23790,15728.02) 23804.99,15743.01 cw(c23819.98,15758) v1@23798.78,15758 ; v1(23790,15758) 23809.18,15738.82 U6.20@23809.18,15659.98 ; U6.20@23798.8,15701.86 ccw(c23773.73,15726.93) 23809.18,15726.93 ccw(c23844.63,15726.93) U6.20@23819.56,15701.86 ; v1(23807,14717) 24520,14717 24702.19,14534.81 24702.19,14272.81 24727,14248 24915,14248 24933,14230 24933,13956 24926.44,13949.44 LED1.1@24885.63,13949.44 ; v1@23813.21,14710.79 cw(c23828.2,14695.8) 23828.2,14717 cw(c23828.2,14738.2) v1@23813.21,14723.21
  Bottom Layer w10: v1@23783.79,15751.79 cw(c23768.8,15736.8) 23790,15736.8 cw(c23811.2,15736.8) v1@23796.21,15751.79 ; v1(23790,15758) 23790,14950.87 23808.78,14932.09 23808.78,14718.78 v1(23807,14717) ; v1@23800.79,14723.21 ccw(c23781.51,14742.49) 23808.78,14742.49 ; 23808.78,14733.9 ccw(c23823.9,14733.9) v1@23813.21,14723.21
LED_G: LED6.3 U7.28 | length 1068.6
  Top Layer w10: v1@24721,13071.22 cw(c24721,13050.02) 24735.99,13065.01 cw(c24750.98,13080) v1@24729.78,13080 ; v1(24721,13080) 24742.69,13058.32 LED6.3@24780.76,13058.32 ; LED6.3@24770.61,13052.11 ccw(c24755.63,13037.12) 24755.63,13058.31 ccw(c24755.63,13079.51) LED6.3@24770.61,13064.52
  Bottom Layer w10: v1@24713,13081 24726.7,13081 24836.16,13190.46 24836.16,13229.96 24943,13336.8 24943,13421 25067,13545 25174,13545 25192,13563 25192,13595 25215.85,13618.85 U7.28@25215.85,13709.75 ; v1@24721,13088.78 ccw(c24721,13121.32) 24744.01,13098.31
LED_G_1: LED1.2 U6.7 | length 2002.9
  Top Layer w10: v1(24037,14687) 24039,14685 24505,14685 24656,14534 24656,14286 24716,14226 24889,14226 24913,14202 24913,14031.93 LED1.2@24885.63,14004.56 ; v1@24043.21,14680.79 cw(c24053.37,14670.63) 24053.37,14685 ; v1@24043.21,14693.21 ccw(c24063.02,14713.02) 24063.02,14685 ; U6.7@24074.32,14994.12 cw(c24049.26,14969.05) 24084.71,14969.05 cw(c24120.16,14969.05) U6.7@24095.09,14994.12 ; U6.7@24084.71,15036 24084.71,14887.29 v1(24102,14870) ; v1@24093.22,14870 ccw(c24072.02,14870) 24087.01,14884.99 ccw(c24102,14899.98) v1@24102,14878.78
  Bottom Layer w10: v1(24037,14687) 24102,14752 v1(24102,14870) ; v1@24037,14695.78 ccw(c24037,14716.98) 24051.99,14701.99 ccw(c24066.98,14687) v1@24045.78,14687 ; v1@24095.79,14863.79 cw(c24080.8,14848.8) 24102,14848.8 cw(c24123.2,14848.8) v1@24108.21,14863.79
LED_H: LED3.2 U7.11 | length 1542.9
  Top Layer w10: LED3.2@24871.63,15044.6 24911.4,15044.6 24927.47,15028.53 24927.47,14624.62 24895.47,14592.62 24895.47,14477.53 25018,14355 25045,14328 25045,14022 25070,13997 25166,13997 v1@25175,13988 ; LED3.2@24882.01,15034.21 cw(c24907.08,15009.15) 24907.08,15044.6 cw(c24907.08,15080.05) LED3.2@24882.01,15054.98 ; 25124.83,13997 cw(c25124.83,13934.83) v1@25168.79,13978.79 ; 25148.98,13997 cw(c25148.98,13958.98) v1@25175.86,13985.86
  Bottom Layer w10: v1@25168.79,13978.79 cw(c25150.2,13960.2) 25176.49,13960.2 ; v1(25175,13985) 25176.49,13983.51 U7.11@25176.49,13898.72 ; 25176.49,13967.41 cw(c25192.59,13967.41) v1@25181.21,13978.79
LED_L: LED5.2 U7.9 | length 724.4
  Top Layer w10: LED5.2@24870.63,14332.6 24897.4,14332.6 ; LED5.2@24883.01,14324.71 cw(c24897.4,14315.54) 24897.4,14332.6 ; LED5.2@24883.01,14340.49 ccw(c24897.4,14349.66) 24897.4,14332.6 ; v1@25090.22,13935 ccw(c25069.02,13935) 25084.01,13949.99 ccw(c25099,13964.98) v1@25099,13943.78 ; v1(25099,13935) 25076,13958 25023,13958 24961.5,14019.5 24961.5,14268.5 24897.4,14332.6
  Bottom Layer w10: v1@25094,13932 25124,13932 ; v1@25105.21,13928.79 cw(c25112.95,13921.05) 25112.95,13932 ; v1@25105.77,13940.59 ccw(c25124,13955.64) 25124,13932 ; 25129.2,13926.8 cw(c25111.33,13908.94) U7.9@25136.6,13908.94 ; U7.9@25137.12,13898.72 25137.12,13918.88 25124,13932
LED_M: LED4.2 U7.10 | length 1145.8
  Top Layer w10: LED4.2@24870.63,14668.99 cw(c24870.63,14621.66) 24904.1,14655.13 ; LED4.2@24870.63,14678.99 cw(c24870.63,14655.8) LED4.2@24887.03,14672.2 ; LED4.2@24870.63,14688.6 24907.47,14651.76 24907.47,14630.07 24877.47,14600.07 24877.47,14467.24 24988.76,14355.96 25023,14321.72 25023,14012 25059,13976 25136,13976 v1@25141,13971 ; LED4.2@24885.32,14683.68 ccw(c24908.89,14683.68) 24892.22,14667.01 ; 25094.08,13976 cw(c25094.08,13924.08) v1@25130.79,13960.79 ; 25118.22,13976 cw(c25118.22,13948.22) v1@25137.86,13967.86
  Bottom Layer w10: v1@25137,13958.22 cw(c25137,13937.02) 25151.99,13952.01 cw(c25166.98,13967) v1@25145.78,13967 ; v1(25137,13967) 25156.8,13947.2 U7.10@25156.8,13898.72
LED_R: LED6.1 U7.29 | length 1015.9
  Top Layer w10: v1@24724,13110.22 cw(c24724,13089.02) 24738.99,13104.01 cw(c24753.98,13119) v1@24732.78,13119 ; v1@24724,13122 v1(24724,13119) 24745.31,13097.68 LED6.1@24780.76,13097.68 ; LED6.1@24770.61,13091.48 ccw(c24755.63,13076.49) 24755.63,13097.68 ccw(c24755.63,13118.88) LED6.1@24770.61,13103.89
  Bottom Layer w10: v1(24724,13119) 24816.16,13211.16 24816.16,13238.25 24923,13345.08 24923,13429.28 25058.72,13565 25163,13565 25171,13573 25171,13603 25171,13613 25196.16,13638.16 U7.29@25196.16,13709.75 ; v1@24724,13127.78 ccw(c24724,13148.98) 24738.99,13133.99 ccw(c24753.98,13119) v1@24732.78,13119
LINEOUT_L: C14.2 C40.1 R29.1 R37.2 | length 1048
  Top Layer w23.62: C40.1@24529.41,14960.42 cw(c24513.49,14944.5) 24536,14944.5 ; C40.1@24529.41,14971.58 ccw(c24513.49,14987.5) 24536,14987.5 ; R29.1@24530.07,15030.09 cw(c24515.77,15015.79) 24536,15015.79 ; R29.1@24533.68,15034.69 24536,15032.37 C40.1@24536,14966 ; C40.1@24534,14966 C40.1@24536,14966 ; R37.2@24537,14894 R37.2@24536,14893 C40.1@24536,14966 ; v1(24589,14965) 24585,14965 24584,14966 C40.1@24536,14966
  Bottom Layer w23.62: v1(24589,14965) 24671,14965 24831,14965 25046,14750 25046,14628 25081,14593 C14.2@25160.69,14593
MIC_IN: U1.6 U1.7 U6.17 | length 1460.9
  Top Layer w15: U6.17@23965.92,15700.1 ccw(c23945.12,15720.9) 23974.54,15720.9 ccw(c24003.95,15720.9) U6.17@23983.15,15700.1 ; U6.17@23974.54,15659.98 23974.54,15765.54 v1(23981,15772) ; 23974.54,15741.23 cw(c24011.77,15741.23) v1@23985.44,15767.56 ; U1.6@24485.61,16407 24488.61,16404 24551,16404 v1(24555,16408) 24555,16446 24544,16457 U1.7@24485.61,16457 ; U1.6@24513.39,16410.47 ccw(c24529,16426.08) 24529,16404 ; 24530.18,16404 ccw(c24530.18,16432.82) 24550.56,16412.44 ccw(c24539.84,16423.16) 24555,16423.16 ccw(c24570.16,16423.16) v1@24559.44,16412.44
  Bottom Layer w15: v1(23981,15772) 24031,15822 24162,15822 24194,15854 24194,16089 24513,16408 v1(24555,16408) ; v1@23981,15778.28 ccw(c23981,15793.44) 23991.72,15782.72 ccw(c24002.44,15772) v1@23987.28,15772 ; v1@24550.56,16403.56 ccw(c24539.84,16392.84) 24539.84,16408 ccw(c24539.84,16423.16) v1@24550.56,16412.44
MIC_N: C50.2 U6.19 | length 2255.1
  Top Layer w15: U6.19@23855.68,15700.1 ccw(c23831.62,15724.16) 23865.65,15724.16 ; v1@23861.21,15814.56 cw(c23850.49,15803.84) 23865.65,15803.84 cw(c23880.81,15803.84) v1@23870.09,15814.56 ; U6.19@23864.3,15659.98 23865.65,15661.33 v1(23865.65,15819) ; 23865.65,15717.64 ccw(c23890.46,15717.64) U6.19@23872.92,15700.1 ; C50.2@23917.34,16228.04 cw(c23896.44,16207.14) 23926,16207.14 ; v1@23920.56,16186.44 ccw(c23907.43,16199.57) 23926,16199.57 ; C50.2@23924,16235.69 23926,16235.69 23926,16187 23925,16186 v1(23925,16182) ; 23926,16212.05 cw(c23948.62,16212.05) C50.2@23932.63,16228.04
  Bottom Layer w15: v1@23861.21,15814.56 ccw(c23850.49,15803.84) 23850.49,15819 ccw(c23850.49,15834.16) v1@23861.21,15823.44 ; v1(23865.65,15819) 23762,15819 23744,15837 23744,15900 23744,15909 23750,15915 23839.29,15915 23845.29,15921 23845.29,15939 23839.29,15945 23744,15945 23683,15945 23677,15951 23677,15969 23683,15975 23744,15975 23830.03,15975 23836.03,15981 23836.03,15999 23830.03,16005 23744,16005 23683,16005 23677,16011 23677,16029 23683,16035 23744,16035 23839.45,16035 23845.45,16041 23845.45,16059 23839.45,16065 23744,16065 23683,16065 23677,16071 23677,16089 23683,16095 23744,16095 23881.74,16095 23887.74,16101 23887.74,16119 23881.74,16125 23750,16125 23744,16131 23744,16140 23744,16162 23764,16182 v1(23925,16182) ; v1@23920.56,16177.56 ccw(c23909.84,16166.84) 23909.84,16182 ccw(c23909.84,16197.16) v1@23920.56,16186.44
MIC_P: C3.2 R50.2 U6.3 | length 2453.4
  Top Layer w10: v1(23922,16517) v1@23924.69,16517
  Top Layer w15: U6.3@23855.62,14995.89 cw(c23836.31,14976.58) 23863.62,14976.58 ; v1@23858.56,14944.44 ccw(c23846.35,14956.65) 23863.62,14956.65 ; v1(23863,14940) 23863.62,14940.62 23863.62,15035.38 U6.3@23864.24,15036 ; 23863.62,14973.59 cw(c23895.15,14973.59) U6.3@23872.85,14995.89 ; C3.2@23914.36,16481.96 ccw(c23895.91,16500.4) 23922,16500.4 ccw(c23948.09,16500.4) C3.2@23929.64,16481.96 ; v1@23917.56,16512.56 cw(c23906.84,16501.84) 23922,16501.84 cw(c23937.16,16501.84) v1@23926.44,16512.56 ; C3.2@23920.9,16477.95 cw(c23929.39,16463.1) 23941.49,16475.2 ; C3.2@23922.98,16463.51 cw(c23922.98,16390.61) 23974.53,16442.16 ; C3.2@23922.98,16478.51 cw(c23922.98,16441.83) 23948.92,16467.76 ; v1@23924.69,16517 23922,16514.31 C3.2@23922,16474.31 23925.31,16471 23945.68,16471 ; C3.2@23928.34,16464.93 cw(c23939.49,16445.42) 23955.38,16461.31 ; C3.2@23930.63,16466.67 cw(c23941.07,16456.22) C3.2@23941.07,16471 ; C3.2@23932.68,16479.09 ccw(c23945.68,16485.5) 23945.68,16471 ; 23986.87,16429.81 cw(c23966.74,16409.68) R50.2@23995.21,16409.68 ; R50.2@23989.25,16427.44 ccw(c24006.02,16444.21) R50.2@24006.02,16420.49 ; R50.2@24007,16409.68 23945.68,16471
  Bottom Layer w15: 23861,14959.99 ccw(c23882.99,14959.99) v1@23867.44,14944.44 ; v1(23863,14940) 23861,14942 23861,15748 23821.72,15787.28 23735.72,15787.28 23652,15871 23652,16164 23922,16434 v1(23922,16517) ; v1@23917.56,16512.56 cw(c23906.84,16501.84) 23922,16501.84 cw(c23937.16,16501.84) v1@23926.44,16512.56
MOTOR_PWM: R31.1 U7.8 | length 704
  Top Layer w10: R31.1@24563,13870.31 24675.69,13870.31 24733.01,13813 24962,13813 v1(25043,13894) ; R31.1@24573.39,13860.9 cw(c24596.11,13838.19) 24596.11,13870.31 cw(c24596.11,13902.44) R31.1@24573.39,13879.72 ; v1@25034.22,13894 cw(c25013.02,13894) 25028.01,13879.01 cw(c25043,13864.02) v1@25043,13885.22
  Bottom Layer w10: v1@25036,13891 25053.87,13873.13 U7.8@25111.51,13873.13
NetC1_1: C1.1 C2.1 R1.1 R2.2 | length 589.6
  Top Layer w18: R1.1@23704.63,16587 C2.1@23774,16587 23774,16550 23795,16529 23858,16529 ; R1.1@23711.21,16580.42 cw(c23727.1,16564.53) 23727.1,16587 cw(c23727.1,16609.47) R1.1@23711.21,16593.58 ; C2.1@23767.42,16579.43 cw(c23751.53,16563.55) 23774,16563.55 cw(c23796.47,16563.55) C2.1@23780.58,16579.43 ; C2.1@23767.42,16580.42 ccw(c23751.53,16564.53) 23751.53,16587 ccw(c23751.53,16609.47) C2.1@23767.42,16593.58 ; R2.2@23845.42,16481.9 ccw(c23829.53,16497.79) 23852,16497.79 ccw(c23874.47,16497.79) R2.2@23858.58,16481.9 ; R2.2@23852,16475.32 23852,16517 23849,16520 23858,16529 ; C1.1@23964.05,16577.43 cw(c23948.16,16561.55) 23970.63,16561.55 cw(c23993.1,16561.55) C1.1@23977.21,16577.43 ; C1.1@23970.63,16585 23970.63,16551.63 23966.78,16547.78 23934.75,16547.78 23892.78,16547.78 23874,16529 23858,16529
NetC3_1: C3.1 MK.1 R2.1 | length 315.9
  Top Layer w15: MK.1@23752.08,16377.61 23814.92,16377.61 R2.1@23852,16414.69 23924,16414.69 C3.1@23928,16410.68 ; 23831.87,16394.56 ccw(c23811.74,16414.69) R2.1@23840.21,16414.69 ; R2.1@23834.25,16396.93 cw(c23851.02,16380.16) R2.1@23851.02,16403.88 ; R2.1@23860.63,16407.04 cw(c23879.07,16388.6) 23879.07,16414.69 cw(c23879.07,16440.78) R2.1@23860.63,16422.33 ; 23892.51,16414.69 cw(c23892.51,16385.17) C3.1@23913.37,16406.04 ; 23897.34,16414.69 ccw(c23897.34,16437.36) C3.1@23913.37,16421.33
NetC4_1: C4.1 R7.1 U1.5 | length 521.5
  Top Layer w15: R7.1@24347.67,16269.37 cw(c24329.22,16250.93) 24355.31,16250.93 cw(c24381.4,16250.93) R7.1@24362.96,16269.37 ; R7.1@24355.31,16278 24355.31,16242.69 24378,16220 24472,16220 24499.32,16247.32 C4.1@24499.32,16278 ; U1.5@24485.61,16357 24530,16357 24552,16335 24552,16296 24541,16285 24500.32,16285 C4.1@24499.32,16284 ; C4.1@24491.67,16269.37 cw(c24473.23,16250.93) 24499.32,16250.93 cw(c24525.41,16250.93) C4.1@24506.96,16269.37 ; C4.1@24506.96,16271.34 cw(c24539.93,16238.37) 24539.93,16285
NetC4_2: C4.2 C7.2 R8.1 U1.1 | length 696.8
  Top Layer w15: U1.1@24274.39,16507 24383,16507 ; R8.1@24379.63,16585 C7.2@24455,16585 24455,16579 24383,16507 ; R8.1@24387.27,16577.36 cw(c24405.72,16558.91) 24405.72,16585 cw(c24405.72,16611.09) R8.1@24387.27,16592.64 ; 24418.56,16298.13 ccw(c24438.69,16318.26) C4.2@24438.69,16289.79 ; C4.2@24420.93,16295.75 cw(c24404.16,16278.98) C4.2@24427.88,16278.98 ; 24433,16557 ccw(c24405.99,16584.02) C7.2@24444.19,16584.02 ; C4.2@24438.69,16278 24403,16313.69 24403,16487 24383,16507 ; C7.2@24447.36,16577.36 ccw(c24428.91,16558.91) 24428.91,16585 ccw(c24428.91,16611.09) C7.2@24447.36,16592.64
NetC5_1: C5.1 R6.2 | length 157.3
  Top Layer w15: C5.1@24107.63,16585 R6.2@24183,16585 ; C5.1@24115.27,16577.36 cw(c24133.72,16558.91) 24133.72,16585 cw(c24133.72,16611.09) C5.1@24115.27,16592.64 ; R6.2@24175.36,16577.36 ccw(c24156.91,16558.91) 24156.91,16585 ccw(c24156.91,16611.09) R6.2@24175.36,16592.64
NetC7_1: C7.1 R6.1 R8.2 U1.2 | length 840
  Top Layer w15: 24219.2,16537.2 ccw(c24183.73,16572.66) R6.1@24233.01,16582 ; R6.1@24236.91,16575.55 cw(c24225.85,16561.63) 24243.63,16561.63 ; 24239.26,16557.26 ccw(c24217.46,16579.06) R6.1@24247.75,16584.8 ; R6.1@24250.35,16575.55 ccw(c24261.41,16561.63) 24243.63,16561.63 ; R6.1@24251.27,16577.36 cw(c24269.72,16558.91) 24269.72,16585 cw(c24269.72,16611.09) R6.1@24251.27,16592.64 ; U1.2@24274.39,16457 24223,16457 24208,16472 24208,16526 24243.63,16561.63 ; R8.2@24311.36,16577.36 ccw(c24292.91,16558.91) 24292.91,16585 ccw(c24292.91,16611.09) R8.2@24311.36,16592.64 ; R8.2@24311.36,16593.63 ccw(c24292.91,16612.07) 24319,16612.07 ccw(c24345.09,16612.07) R8.2@24326.64,16593.63 ; C7.1@24507.99,16593.63 ccw(c24489.54,16612.07) 24515.63,16612.07 ccw(c24541.72,16612.07) C7.1@24523.27,16593.63 ; C7.1@24515.63,16585 24515.63,16631.37 24508,16639 24337,16639 24319,16621 R8.2@24319,16585 R6.1@24243.63,16585 24243.63,16561.63
NetC9_1: C9.1 C11.1 U2.10
NetC12_1: C12.1 R9.1 | length 69.2
  Bottom Layer w23.62: C12.1@25217,14666 25219,14668 R9.1@25285.37,14668
NetC13_1: C13.1 U2.3 | length 129
  Bottom Layer w23.62: C13.1@25012,14387.32 25016.32,14383 25044,14383 25053.18,14373.82 U2.3@25111.53,14373.82 ; C13.1@25017.58,14391.91 ccw(c25039.09,14413.42) 25039.09,14383